# EAGLE board Kichen-Hazard-Management (EAGLE 9.7.0)

Size 203.98 x 122.21 mm. Coordinates in mm from the lower left corner, seen from the top.
Outline: 0,0 203.98,0 203.98,122.21 0,122.21 0,0
Copper layers (1*16): Top 0.035mm / dielectric 1.5mm / Bottom 0.035mm
Design rules "default": minimum track width 6mil, minimum drill 0.35mm, track to track 6mil, track to pad 6mil, pad to pad 6mil, via to via 6mil, smd to smd 6mil, copper to edge 40mil, drill to drill 6mil, minimum pad ring 10mil, minimum via ring 8mil, stop-mask expansion 4mil, vias tented up to drill 0mil, thermal gap 10mil

## Footprints (pad centres in the part's own frame; a part is rotated, then mirrored left to right if it is on the bottom)
MQ-XX-SOCKET = drill 1.27: 1 -6.223,6.223; 2 -8.788,0; 3 -6.223,-6.223; 4 6.223,-6.223; 5 8.788,0; 6 6.223,6.223
PIEZO = drill 1 pad 1.6: 1 -3.5,0; 2 3.5,0
RESAD1016W63L850D250B = drill 0.83 pad 1.43: 1 -5.08,0; 2 5.08,0
HA-06-SM065 = drill 1 pad 1.676: 1 -2.54,-2.54; 2 0,2.54; 3 2.54,-2.54
ARDUINO-UNO-R3-SHIELD = drill 1.016 pad 1.88: 3.3V 24.13,-2.54; 5V 24.13,0; A0 24.13,12.7; A1 24.13,15.24; A2 24.13,17.78; A3 24.13,20.32; A4 24.13,22.86; A5 24.13,25.4; AREF -24.13,-13.97; D2 -24.13,20.32; D3 -24.13,17.78; D4 -24.13,15.24; D5 -24.13,12.7; D6 -24.13,10.16; D7 -24.13,7.62; D8 -24.13,3.81; D9 -24.13,1.27; D10 -24.13,-1.27; D11 -24.13,-3.81; D12 -24.13,-6.35; D13 -24.13,-8.89; GND@0 24.13,2.54; GND@1 24.13,5.08; GND@2 -24.13,-11.43; IOREF 24.13,-7.62; NC 24.13,-10.16; RES 24.13,-5.08; RX -24.13,25.4; SCL -24.13,-19.05; SDA -24.13,-16.51; TX -24.13,22.86; VIN 24.13,7.62
JHD-162A = drill 1.016 long: 1 -19.05,0; 2 -16.51,0; 3 -13.97,0; 4 -11.43,0; 5 -8.89,0; 6 -6.35,0; 7 -3.81,0; 8 -1.27,0; 9 1.27,0; 10 3.81,0; 11 6.35,0; 12 8.89,0; 13 11.43,0; 14 13.97,0; 15 16.51,0; 16 19.05,0
TO92 = drill 0.813 octagon: 1 -1.27,0; 2 0,1.905; 3 1.27,0

## Placement (x,y rotation side)
GAS1  GAS-SENSORMQ-XX-SOCKET  [MQ-XX-SOCKET]  152.17,94.19 270 top
PIEZO1  PIEZO  [PIEZO]  176.3,105.62 180 top
R1  220  [RESAD1016W63L850D250B]  132.01,46.66 90 top
R2  1k  [RESAD1016W63L850D250B]  147.09,113.24 90 top
RPOT1  250k  [HA-06-SM065]  154.87,46.66 0 top
U1  ARDUINO-UNO-R3-SHIELD  [ARDUINO-UNO-R3-SHIELD]  47.88,64.81 270 top
U2  LCD-16X2JHD-162A  [JHD-162A]  115.5,36.63 0 top
U3  TMP36GT9Z_TO92  [TO92]  197.89,87.84 0 top

## Library data of the parts
GAS1 PIEZO1 R1 R2 RPOT1 U1-U3 = Tinkercad

## Nets
U1_5V: GAS1.4 GAS1.5 GAS1.6 R1.2 RPOT1.1 U1.5V U2.2 U3.3
U1_A0: GAS1.1 GAS1.3 R2.1 U1.A0
U1_A1: U1.A1 U3.2
U1_D4: U1.D4 U2.11
U1_D5: U1.D5 U2.12
U1_D6: U1.D6 U2.13
U1_D7: U1.D7 U2.14
U1_D8: U1.D8 U2.6
U1_D9: U1.D9 U2.4
U1_D11: PIEZO1.1 U1.D11
U1_GND: GAS1.2 PIEZO1.2 R2.2 RPOT1.3 U1.GND@0 U1.GND@1 U1.GND@2 U2.1 U2.5 U2.16 U3.1
U2_LED+: R1.1 U2.15
U2_VO: RPOT1.2 U2.3

## Tracks (layer width: path | path; a pad name or v marks a point on that pad's centre or on a via)
U1_5V  (7 unrouted)
U1_A0  (3 unrouted)
U1_A1  (1 unrouted)
U1_D4  (1 unrouted)
U1_D5  (1 unrouted)
U1_D6  (1 unrouted)
U1_D7  (1 unrouted)
U1_D8  (1 unrouted)
U1_D9  (1 unrouted)
U1_D11  (1 unrouted)
U1_GND  (10 unrouted)
U2_LED+  (1 unrouted)
U2_VO  (1 unrouted)